# EAGLE board v7_bluetooth-20x20_chip-ant-var-1_qfn-vias (EAGLE 9.0.1)
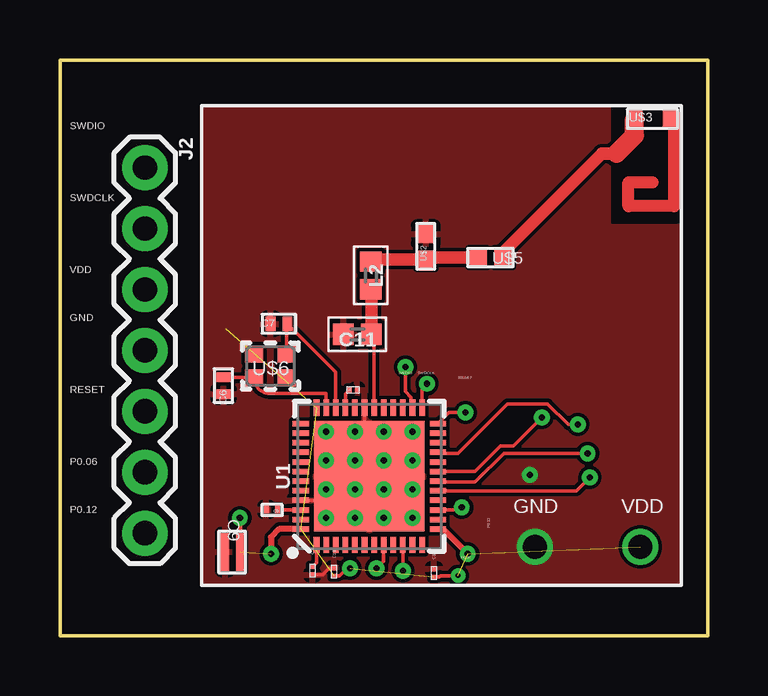
[diagram p0: board, top side]
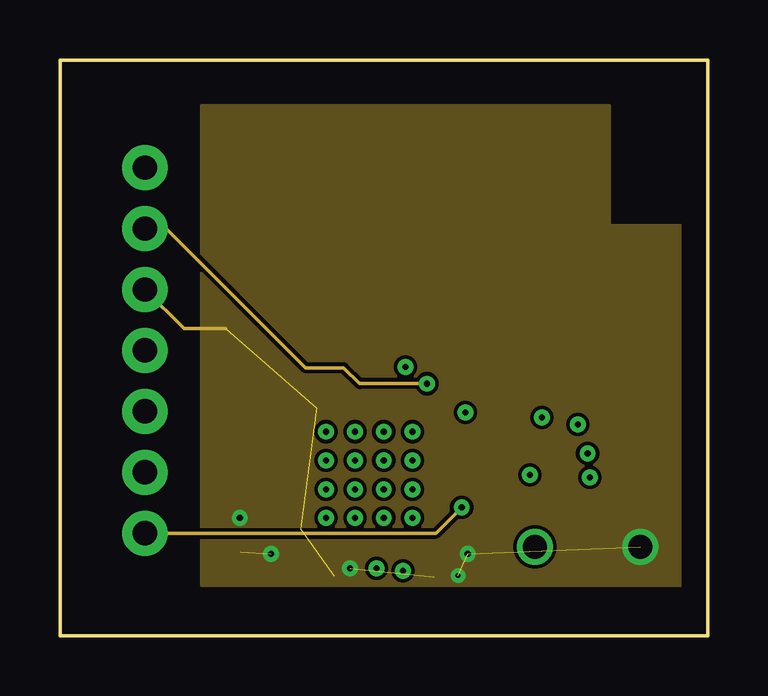
[diagram p1: board, inner layer Route8]
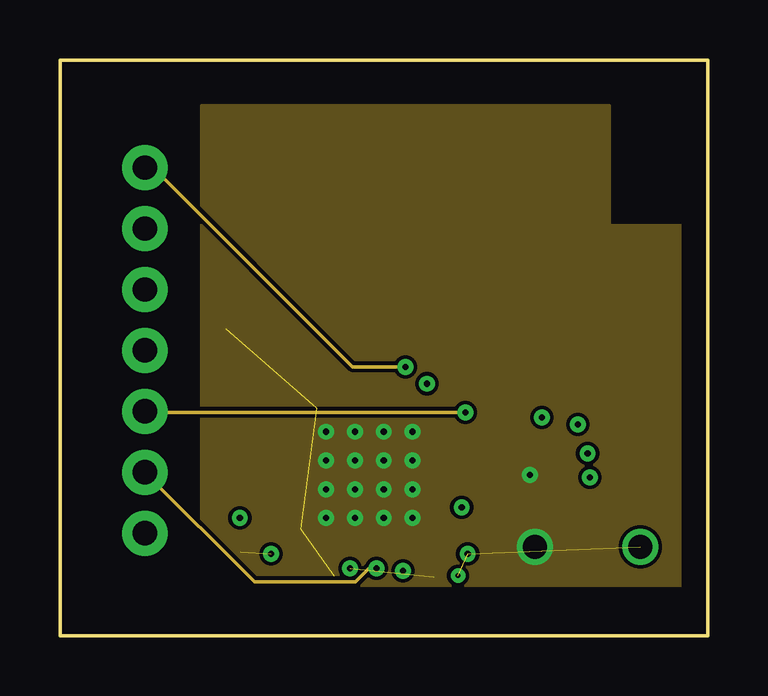
[diagram p2: board, inner layer Route10]
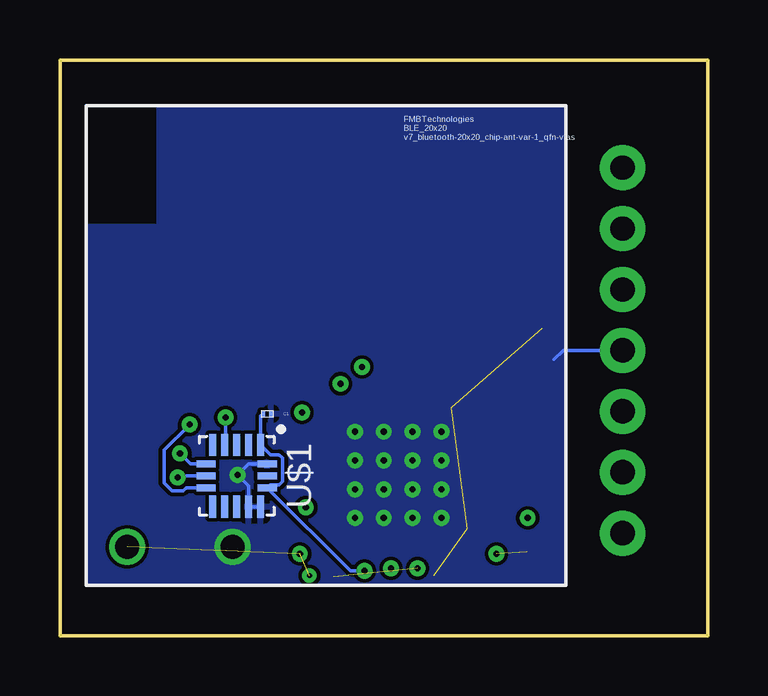
[diagram p3: board, bottom side, seen from below]

Size 27 x 24 mm. Coordinates in mm from the lower left corner, seen from the top.
Outline: 0,0 0,24 27,24 27,0 0,0
Copper layers (1*8*10*16): Top 0.035mm / dielectric 0.175mm / Route8 0.017mm / dielectric 0.145mm / Route10 0.017mm / dielectric 0.175mm / Bottom 0.035mm
Design rules "default *": minimum track width 6mil, minimum drill 8mil, track to track 6mil, track to pad 6mil, pad to pad 6mil, via to via 6mil, smd to smd 6mil, copper to edge 40mil, drill to drill 6mil, minimum pad ring 10mil, minimum via ring 8mil, stop-mask expansion 4mil, vias tented up to drill 0mil, thermal gap 10mil

## Footprints (pad centres in the part's own frame; a part is rotated, then mirrored left to right if it is on the bottom)
CAP_0402-L = smd 0.178 x 0.254: 1 -0.152,0; 2 0.178,0
CAPC1005X55N = smd 0.4 x 0.6: 1 -0.4,0; 2 0.3,0
CAPC0502X28N = smd 0.25 x 0.3: 1 -0.3,0; 2 0.2,0
4P7UFCAPACITOR = smd 0.35 x 1.6: 1 -0.4,0.1; 2 0.25,0.1
0402 = smd 0.85 x 0.9: 1 -0.58,0; 2 0.58,0
1X07 = drill 1.016 pad 1.88: 1 0,0; 2 2.54,0; 3 5.08,0; 4 7.62,0; 5 10.16,0; 6 12.7,0; 7 15.24,0
QFN48-6X6MM = smd 0.68 x 0.23: 1 -2.86,2.2; 2 -2.86,1.8; 3 -2.86,1.4; 4 -2.86,1; 5 -2.86,0.6; 6 -2.86,0.2; 7 -2.86,-0.2; 8 -2.86,-0.6; 9 -2.86,-1; 10 -2.86,-1.4; 11 -2.86,-1.8; 12 -2.86,-2.2; 25 2.86,-2.2; 26 2.86,-1.8; 27 2.86,-1.4; 28 2.86,-1; 29 2.86,-0.6; 30 2.86,-0.2; 31 2.86,0.2; 32 2.86,0.6; 33 2.86,1; 34 2.86,1.4; 35 2.86,1.8; 36 2.86,2.2 | smd 0.23 x 0.68: 13 -2.2,-2.86; 14 -1.8,-2.86; 15 -1.4,-2.86; 16 -1,-2.86; 17 -0.6,-2.86; 18 -0.2,-2.86; 19 0.2,-2.86; 20 0.6,-2.86; 21 1,-2.86; 22 1.4,-2.86; 23 1.8,-2.86; 24 2.2,-2.86; 37 2.2,2.86; 38 1.8,2.86; 39 1.4,2.86; 40 1,2.86; 41 0.6,2.86; 42 0.2,2.86; 43 -0.2,2.86; 44 -0.6,2.86; 45 -1,2.86; 46 -1.4,2.86; 47 -1.8,2.86; 48 -2.2,2.86 | smd 4.6 x 4.6: EP 0,0
TFLGA-16/3.3MMX3.1MM = smd 0.3 x 0.8: CS 0.5,-1.275; GND@3 -0.5,1.275; MISO 0,-1.275; MOSI -0.5,-1.275; NC@2 0,1.275; VS 0.5,1.275 | smd 0.925 x 0.3: GND@1 1.288,0.5; GND@2 1.288,1; INT1 1.288,0; INT2 1.288,-1; NC@1 -1.288,0.5; RESERVED@1 -1.288,0; RESERVED@2 -1.288,-1; RESERVED@3 1.288,-0.5; SCLK -1.288,-0.5; VDD/IO -1.288,1
0402' = smd 0.75 x 0.75: 1 -1.62,0; 2 -0.57,0
2450AT14A0100 = smd 0.65 x 0.8: FEED 0.3,0.4; NC 1.8,0.4
0402-1005 = smd 0.75 x 0.75: 1 -0.35,0; 2 0.7,0
32MHZCRYSTAL = smd 0.75 x 0.7: 1 0.485,0.47; 2 1.835,0.47; 3 1.835,1.47; 4 0.485,1.47

## Placement (x,y rotation side)
C1  C0402X5R0G104M020BCCAP_0402-L  [CAP_0402-L]  18.35,9.25 180 bottom
C3  C0402X5R0G104M020BCCAP_0402-L  [CAP_0402-L]  10.53,2.72 270 top
C4  C0402C0G1C101J020BCCAP_0402-L  [CAP_0402-L]  12.21,10.23 0 top
C6  GRM1555C1H6R0CA01D  [CAPC1005X55N]  6.82,10.47 90 top
C7  GRM1555C1H6R0CA01D  [CAPC1005X55N]  9.18,13 0 top
C8  GRMMDXR60J105ME05D  [CAPC0502X28N]  8.79,5.26 180 top
C9  4P7UFCAPACITOR4P7UFCAPACITOR  [4P7UFCAPACITOR]  7.28,3.38 0 top
C10  C0402X5R0G104M020BCCAP_0402-L  [CAP_0402-L]  15.59,2.62 270 top
C11  0.8pF  [0402]  12.4,12.56 0 top
C12  C0402X5R0G104M020BCCAP_0402-L  [CAP_0402-L]  11.43,2.66 270 top
J2  header  [1X07]  3.54,19.51 270 top
L2  3.9nH  [0402]  12.96,15.01 90 top
U1  NRF52832  [QFN48-6X6MM]  12.9,6.64 90 top
U$1  ADXL362  [TFLGA-16/3.3MMX3.1MM]  19.63,6.66 270 bottom
U$2  TUNINGINDUCTOR  [0402']  15.25,17.31 90 top
U$3  2450AT14A0100  [2450AT14A0100]  23.65,21.15 0 top
U$5  0402-1005  [0402-1005]  18.13,15.76 180 top
U$6  32MHZCRYSTAL  [32MHZCRYSTAL]  9.94,12.21 180 top

## Library data of the parts
C1 C3 C10 C12 = 0p1_uF_capacitor; MANUFACTURER_PART_NUMBER: C0402C0G1C101J020BC; VENDOR: TDK
C4 = 100_pF_capacitor; MANUFACTURER_PART_NUMBER: C0402C0G1C101J020BC; VENDOR: TDK
C6 C7 = 6pf_capacitor_new-bigger; DESCRIPTION: 0402 6 pF 50 V ±0.25 pF Tolerance C0G SMT Multilayer Ceramic Capacitor; DIGI-KEY_PART_NUMBER: 490-8222-1-ND; DIGI-KEY_PURCHASE_URL: https://www.digikey.com/product-detail/en/murata-electronics-north-america/GRM1555C1H6R0CA01D/490-8222-1-ND/4380516?WT.z_cid=ref_snapeda&utm_source=snapeda&utm_medium=aggregator&utm_campaign=buynow; MF: Murata; MP: GRM1555C1H6R0CA01D; PACKAGE: 0402 Murata
C8 = 1UFCAPACITOR; DESCRIPTION: Cap, Mlcc, X5r, 1uf, 6.3v, 015008; DIGI-KEY_PART_NUMBER: 490-13424-1-ND; DIGI-KEY_PURCHASE_URL: https://www.digikey.com/product-detail/en/murata-electronics-north-america/GRMMDXR60J105ME05D/490-13424-1-ND/6023636?WT.z_cid=ref_snapeda&utm_source=snapeda&utm_medium=aggregator&utm_campaign=buynow; MF: Murata; MP: GRMMDXR60J105ME05D; PACKAGE: 015008 Murata
C9 = 4p7_uF_capacitor; MANUFACTURER_PART_NUMBER: C0816X5R0J475M050AC; VENDOR: TDK
C11 = nrf52832-breakout-temp; PROD_ID: CAP-13456
J2 = SparkFun-Connectors
L2 = nrf52832-breakout-temp; PROD_ID: NDUC-13457
U1 = nrf52832-breakout-temp; PROD_ID: IC-13460
U$1 = ADXL362
U$2 = tuninginductor
U$3 = antennanew
U$5 = 0402-1005
U$6 = 32_mhz_crystal

## Nets
ADXL_POWER-QFAA: C1.2 U1.10 U$1.VDD/IO U$1.VS
ANT-QFAA: C11.2 L2.1 U1.30
CS-QFAA: U1.21 U$1.CS
DEC1-QFAA: C3.1 U1.1
DEC3-QFAA: C4.1 U1.33
DEC4-QFAA: C8.1 U1.46
GND: C1.1 C3.2 C4.2 C6.1 C7.1 C8.2 C9.1 C10.1 C11.1 C12.1 J2.4 U1.31 U1.45 U1.EP U$1.GND@1 U$1.GND@2 U$1.GND@3 U$2.2
MISO-QFAA: U1.17 U$1.MISO
MOSI-QFAA: U1.18 U$1.MOSI
N$1: L2.2 U$2.1 U$5.2
N$2: U$3.FEED U$5.1
P0.06-QFAA: J2.6 U1.8
P0.12-QFAA: J2.7 U1.15
RESET-QFAA: J2.5 U1.24
SCLK-QFAA: U1.19 U$1.SCLK
SWDCLK-QFAA: J2.2 U1.25
SWDIO-QFAA: J2.1 U1.26
VDD: C9.2 C10.2 C12.2 J2.3 U1.13 U1.36 U1.48
XC1-QFAA: C7.2 U1.34 U$6.1
XC2-QFAA: C6.2 U1.35 U$6.3

## Tracks (layer width: path | path; a pad name or v marks a point on that pad's centre or on a via)
ADXL_POWER-QFAA  (via drill 0.25)
  Top 0.152: v14.3,2.7 U1.10
  Bottom 0.152: C1.2 18.63,9.15 U$1.VDD/IO 18.22,7.54 17.86,7.54 17.73,7.41 17.73,6.42 17.86,6.28 18.23,6.28 U$1.VS 14.89,2.7 v14.3,2.7
ANT-QFAA
  Top 0.152: U1.30 13.1,12.44 C11.2
  Top 0.517: C11.2 12.98,14.41 L2.1
CS-QFAA  (via drill 0.25)
  Top 0.152: U1.21 15.8,7.6 16.6,7.6 18.66,9.66 20.33,9.66 21.19,8.8 v21.6,8.8
  Bottom 0.152: v21.6,8.8 v21.6,8.79 22.66,7.73 22.66,6.37 22.33,6.04 21.87,6.04 21.75,6.16 U$1.CS
DEC1-QFAA
  Top 0.152: U1.1 10.7,3.04 C3.1
DEC3-QFAA
  Top 0.152: U1.33 11.9,10.07 C4.1
DEC4-QFAA
  Top 0.152: U1.46 9.11,5.24 C8.1
GND  (via drill 0.25, 0.25 pad 0.51, 1)
  Top 0.152: U1.31 12.7,7.7 v12.3,7.3 | C3.2 10.95,2.54 11.21,2.8 11.42,2.8 C12.1 | U1.45 13.04,5.64 v13.5,6.1 13.44,6.1 U1.EP
  Bottom 0.152: U$1.GND@3 19.14,7.16 v19.6,6.7 19.13,6.23 U$1.GND@1 U$1.GND@2 | J2.4 6.01,11.89 6.4,11.5
  other vias: 11.1,8.5 12.3,8.5 13.5,8.5 14.7,8.5 11.1,7.3 11.1,6.1 11.1,4.9 13.5,7.3 14.7,7.3 14.7,6.1 12.3,6.1 12.3,4.9 13.5,4.9 14.7,4.9 19.8,3.7
  pour Top (isolate 0.132): 5.9,2.1 5.9,22.1 22.9,22.1 22.9,17.1 25.9,17.1 25.9,2.1
  pour Bottom (isolate 0.132): 5.9,2.1 5.9,22.1 22.9,22.1 22.9,17.1 25.9,17.1 25.9,2.1
  pour Route10: 5.9,2.1 5.9,22.1 22.9,22.1 22.9,17.1 25.9,17.1 25.9,2.1
MISO-QFAA  (via drill 0.25)
  Top 0.152: v22.1,6.6 21.54,6.04 U1.17
  Bottom 0.152: U$1.MISO 22.04,6.66 v22.1,6.6
MOSI-QFAA  (via drill 0.25)
  Top 0.152: v22,7.6 18.5,7.6 17.3,6.4 15.8,6.4 U1.18
  Bottom 0.152: U$1.MOSI 21.56,7.16 v22,7.6
N$1
  Top 0.517: L2.2 13.06,15.69 U$2.1 15.33,15.76 U$5.2
N$2
  Top 0.517: U$5.1 18.48,15.98 22.6,20.1 23.2,20.1
  Top 0.8: 23.2,20.1 23.95,20.85 U$3.FEED
N$3
  Top 0.5: 25.6,21.7 25.6,17.9 23.7,17.9 23.7,18.9 24.7,18.9
P0.06-QFAA  (via drill 0.25)
  Top 0.152: U1.8 13.5,3.1 v13.2,2.8
  Route10 0.152: v13.2,2.8 12.89,2.8 12.33,2.24 8.11,2.24 J2.6
P0.12-QFAA  (via drill 0.25)
  Top 0.152: v16.75,5.35 16.64,5.24 U1.15
  Route8 0.152: J2.7 15.67,4.27 v16.75,5.35
RESET-QFAA  (via drill 0.25)
  Top 0.152: U1.24 16.22,9.3 v16.9,9.3
  Route10 0.152: v16.9,9.3 3.59,9.3 J2.5
SCLK-QFAA  (via drill 0.25)
  Top 0.152: U1.19 17.31,6.84 18.37,7.9 18.91,7.9 v20.1,9.1
  Bottom 0.152: v20.1,9.1 20.1,7.98 U$1.SCLK
SWDCLK-QFAA  (via drill 0.25)
  Top 0.152: U1.25 15.1,10.3 v15.3,10.5
  Route8 0.152: v15.3,10.5 12.49,10.5 11.83,11.16 10.24,11.16 4.43,16.97 J2.2
SWDIO-QFAA  (via drill 0.25)
  Top 0.152: U1.26 14.64,9.55 14.64,9.93 14.4,10.17 v14.4,11.2
  Route10 0.152: v14.4,11.2 12.2,11.2 3.89,19.51 J2.1
VDD  (via drill 0.2, 0.25, 1)  (7 unrouted)
  Top 0.152: C9.2 7.53,4.87 v7.5,4.9 | C12.2 11.45,2.5 11.66,2.5 11.96,2.8 v12.1,2.8 | C10.2 15.61,2.45 15.81,2.45 15.86,2.5 v16.6,2.5
  Top 0.254: U1.48 9.14,4.44 8.8,4.1 v8.8,3.4 | U1.13 15.96,4.44 v17,3.4
  Route8 0.152: J2.3 5.17,12.8 6.9,12.8
  other vias: 24.2,3.7
  pour Route8: 5.9,2.1 5.9,22.1 22.9,22.1 22.9,17.1 25.9,17.1 25.9,2.1
XC1-QFAA
  Top 0.152: U1.34 11.5,10.98 C7.2 9.45,12.97 U$6.1
XC2-QFAA
  Top 0.152: C6.2 8.07,10.77 U$6.3 arc90 8.74,10.1 11.1,10.1 arc90 11.1,10.1 U1.35

## Text on the board
tSilk: SWDIO | SWDCLK | VDD | GND | SWDIO | SWDCLK | RESET | RESET | P0.06 | P0.12 | P0.12 | GND | VDD | P0.06
_bsilk: FMBTechnologies / BLE_20x20 / v7_bluetooth-20x20_chip-ant-var-1_qfn-vias